# Allegro board pc069b_toplevel_18bare.brd
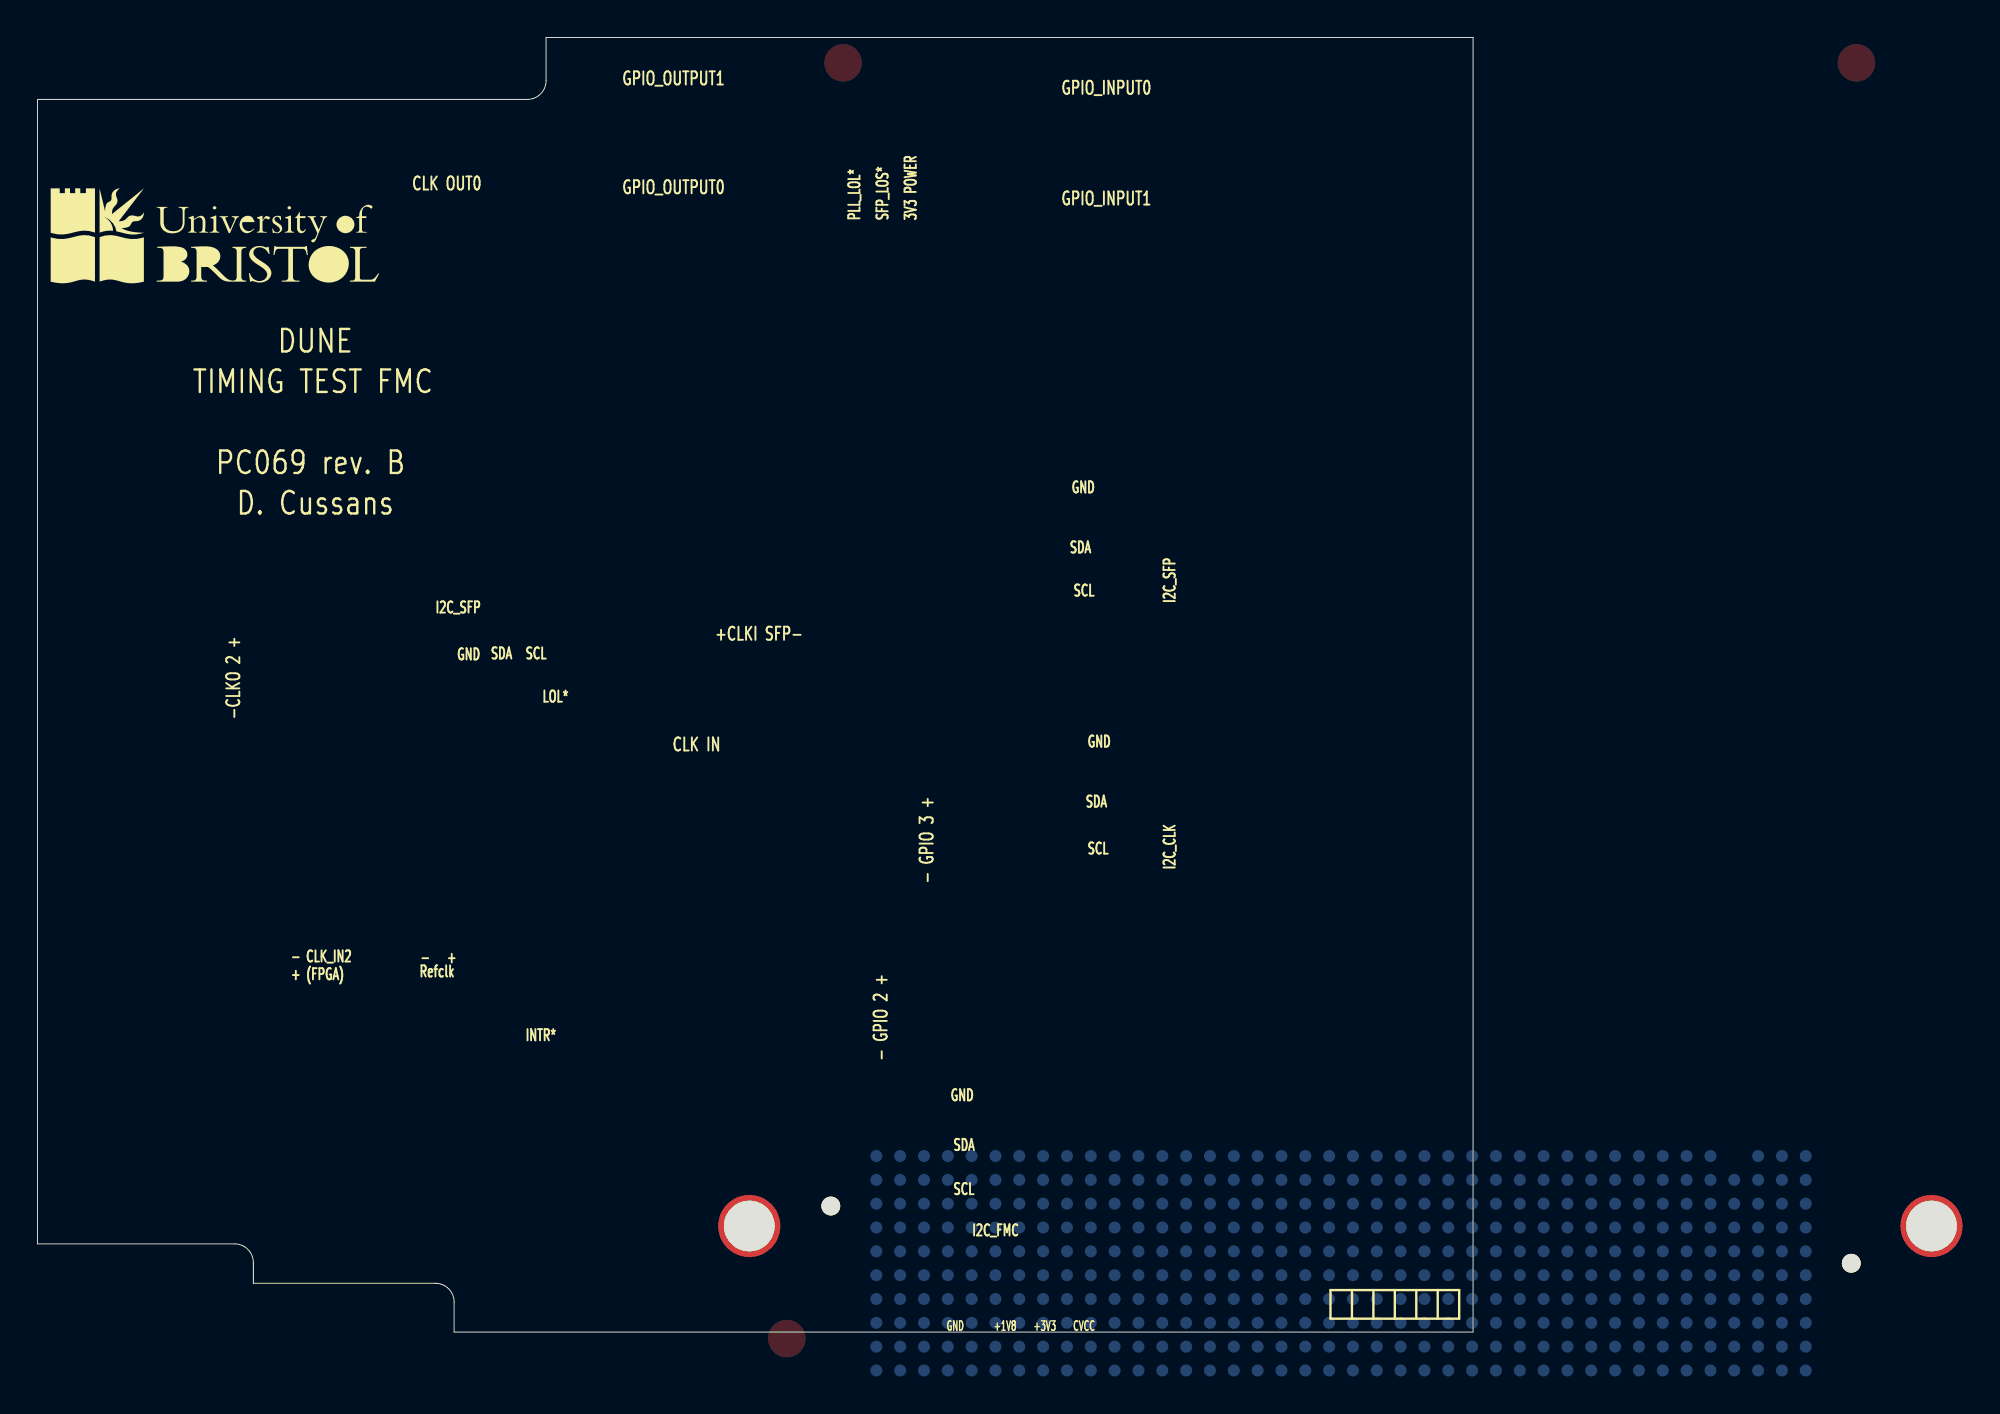
[diagram p0: board, top side]
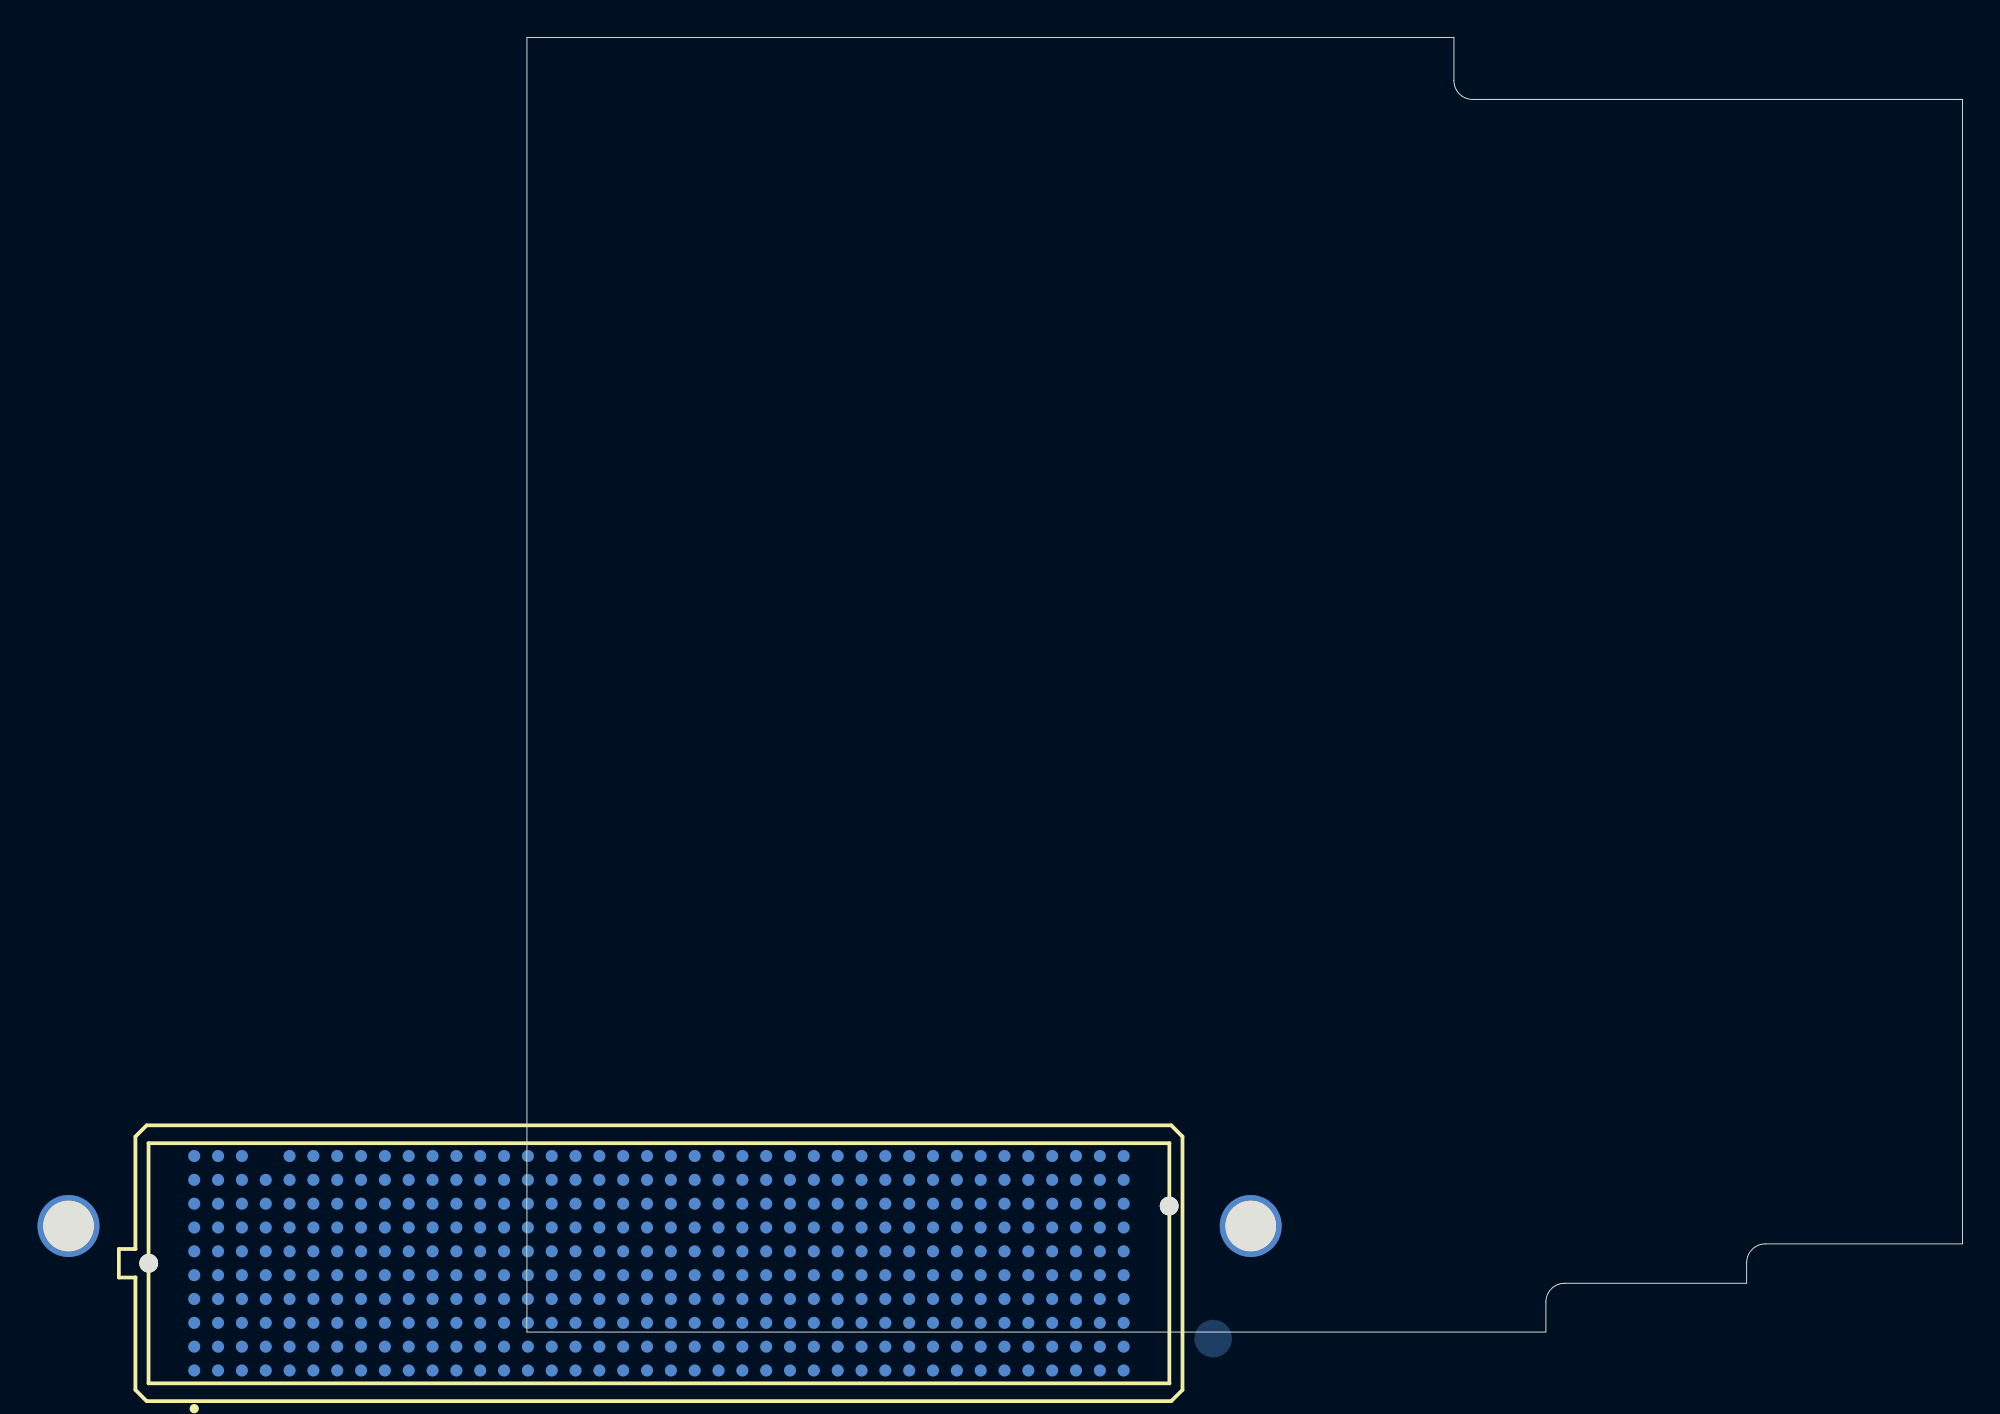
[diagram p1: board, bottom side, seen from below]

Outline 76.5 x 69 mm; copper layers: TOP, BOTTOM. Coordinates in mm from the lower left corner of the outline.
Outline path: 0,65.7 0,4.7 10.5,4.7 arc(11.21,4.41) 11.5,3.7 11.5,2.6 21.2,2.6 arc(21.91,2.31) 22.2,1.6 22.2,0 76.5,0 76.5,69 27.1,69 27.1,66.7 arc(26.81,65.99) 26.1,65.7 0,65.7

## Design rules (mm)
constraint set DEFAULT: min track width 0.127, pair gap 0.152
net group CLK0_M2C: nets CLK0_M2C_N CLK0_M2C_P
net group CLK_IN0: nets CLK_IN0_N CLK_IN0_P
net group CLK_IN1: nets CLK_IN1_N CLK_IN1_P
net group CLK_IN2: nets CLK_IN2_N CLK_IN2_P
net group DP_OSC: nets UNNAMED_4_CAPCERSMDCL2_I119_A UNNAMED_4_CAPCERSMDCL2_I120_A
net group F_FMC_CLK: nets CLK0_C2M_N CLK0_C2M_P
net group F_GPIO_OUT0: nets F_GPIO_OUT0_N F_GPIO_OUT0_P
net group F_GPIO_OUT1: nets F_GPIO_OUT1_N F_GPIO_OUT1_P
net group FFD_CLK: nets T_FFD_CLK_N T_FFD_CLK_P
net group FFD_DI: nets C2M_SFP_DATA_N C2M_SFP_DATA_P
net group FMC_REC_CLK: nets CLK1_M2C_N CLK1_M2C_P
net group GPIO_IN0: nets GPIO_IN0_N GPIO_IN0_P
net group GPIO_IN1: nets GPIO_IN1_N GPIO_IN1_P
net group GPIO_IO3: nets GPIO_IO3_N GPIO_IO3_P
net group OSC_CLK: nets OSC_CLK_N OSC_CLK_P
net group PAR_CLKO: nets T_DIFF_UFL_CLK_N T_DIFF_UFL_CLK_P
net group PAR_DI: nets GPIO_IO2_N GPIO_IO2_P
net group PLL_ZDM_CLK: nets PLL_ZDM_CLK_N PLL_ZDM_CLK_P
net group SFP2PLL_DATA: nets SFP2PLL_DATA_N SFP2PLL_DATA_P
net group SFP_DI: nets F_SFP_N F_SFP_P
net group SFP_DO: nets T_SFP_N T_SFP_P
net group T_FMC: nets M2C_SFP_DATA_N M2C_SFP_DATA_P
nets with their own width: min track width 0.254; nets CVCC GND
nets with their own width: min track width 0.3; nets CTRLVCC P1V8 P3V3 P12V

## Placement (name value [footprint] x y rotation side)
NOREF  -  []  76.5 0 90 top
NOREF#2  -  []  -17.4 170.4 0 top
NOREF#3  -  []  133.3 -3.6 0 top
NOREF#4  -  []  -14.4 165.4 0 top
NOREF#5  -  []  26.9 66.1 0 top
NOREF#6  -  []  36.8 -3.6 0 top
NOREF#7  -  []  0 4.7 90 top
NOREF#8  -  []  0.7 55.9 0 top
NOREF#9  -  []  0 -16 0 top
NOREF#10  -  []  193.22 -17.27 0 top
NOREF#11  -  []  76 135.5 0 top
NOREF#12  -  []  65.6 3 0 top
NOREF#13  -  []  -17.4 -17.4 0 top
NOREF#14  -  []  14.55 96.4 0 top
NOREF#15  -  []  22.2 -3 0 top
NOREF#16  -  []  76.5 -16 0 top
NOREF#17  -  []  96.5 -16 0 top
NOREF#18  -  []  79.4 51.5 0 top
NOREF#19  -  []  11.5 2.6 90 top
NOREF#20  -  []  0 65.7 0 top
NOREF#21  -  []  -14.4 -12.4 0 top
NOREF#22  -  []  11.5 2.6 0 top
NOREF#23  -  []  -19.38 84 0 top
NOREF#24  -  []  76 219.5 0 top
NOREF#25  -  []  -17.4 -17.4 0 top
NOREF#26  -  [unnamed#2]  100.93 5.65 270 top
NOREF#27  -  []  11 63.45 90 top
NOREF#28  -  []  76 185.5 0 top
NOREF#29  -  [unnamed#2]  37.93 5.65 270 top
NOREF#30  -  []  173 -16 0 top
NOREF#31  -  []  15.2 23.1 0 top
NOREF#32  -  []  -94 -116.7 0 top
NOREF#33  -  []  0 4.65 0 top
NOREF#34  -  []  2.6 -16.15 0 top
NOREF#35  -  []  -18.77 254.4 0 top
NOREF#36  -  []  79.5 0 90 top
NOREF#37  -  []  -17.4 -17.4 0 top
NOREF#38  -  []  11.21 4.4 0 top
NOREF#39  -  []  0 -3 0 top
NOREF#40  -  []  0 64.3 0 top
NOREF#41  -  []  76 101.5 0 top
NOREF#42  -  []  -7.4 -16.15 0 top
NOREF#43  -  []  -14.3 0 0 top
NOREF#44  -  []  11.5 -2.5 0 top
NOREF#45  -  []  180.4 -21.05 0 top
NOREF#46  -  []  -19.38 153 0 top
NOREF#47  -  []  109.15 64.3 0 top
NOREF#48  -  []  -14.3 69 0 top
NOREF#49  -  []  266.9 -16.15 0 top
NOREF#50  -  []  -14.3 237 0 top
NOREF#51  -  []  22 2.2 0 top
NOREF#52  -  []  0 65.7 0 top
NOREF#53  -  []  -18.77 249.4 0 top
NOREF#54  -  []  -14.3 168 0 top
NOREF#55  -  []  12.65 64.3 0 top
NOREF#56  -  []  27.1 69 0 top
NOREF#57  -  []  22.2 0 90 top
NOREF#58  -  []  76 17.5 0 top
P1  -  [SAMTEC_SEAM-40-035-S-10-2-A]  69.46 3.67 0 bottom

## Library data of the parts
P1 = CON400P_40ABCDEFGHJK: part number: CON400P_40ABCDEFGHJK-SEAM-40-03.5-S-10-2-A-K-TR

## Footprints (pads in the part's own frame, mm; a bottom-side part is the same pattern mirrored in y, then rotated)
SAMTEC_SEAM-40-035-S-10-2-A
  round 1 hole 1.3 unplated: (-27.19,-3.05) (27.19,0)
  round 0.64 smd: A1(24.765,5.715) A2(23.495,5.715) A3(22.225,5.715) A4(20.955,5.715) A5(19.685,5.715) A6(18.415,5.715) A7(17.145,5.715) A8(15.875,5.715) A9(14.605,5.715) A10(13.335,5.715) A11(12.065,5.715) A12(10.795,5.715) A13(9.525,5.715) A14(8.255,5.715) A15(6.985,5.715) A16(5.715,5.715) A17(4.445,5.715) A18(3.175,5.715) A19(1.905,5.715) A20(0.635,5.715) A21(-0.635,5.715) A22(-1.905,5.715) A23(-3.175,5.715) A24(-4.445,5.715) A25(-5.715,5.715) A26(-6.985,5.715) A27(-8.255,5.715) A28(-9.525,5.715) A29(-10.795,5.715) A30(-12.065,5.715) A31(-13.335,5.715) A32(-14.605,5.715) A33(-15.875,5.715) A34(-17.145,5.715) A35(-18.415,5.715) A36(-19.685,5.715) A37(-20.955,5.715) A38(-22.225,5.715) A39(-23.495,5.715) A40(-24.765,5.715) B1(24.765,4.445) B2(23.495,4.445) B3(22.225,4.445) B4(20.955,4.445) B5(19.685,4.445) B6(18.415,4.445) B7(17.145,4.445) B8(15.875,4.445) B9(14.605,4.445) B10(13.335,4.445) B11(12.065,4.445) B12(10.795,4.445) B13(9.525,4.445) B14(8.255,4.445) B15(6.985,4.445) B16(5.715,4.445) B17(4.445,4.445) B18(3.175,4.445) B19(1.905,4.445) B20(0.635,4.445) B21(-0.635,4.445) B22(-1.905,4.445) B23(-3.175,4.445) B24(-4.445,4.445) B25(-5.715,4.445) B26(-6.985,4.445) B27(-8.255,4.445) B28(-9.525,4.445) B29(-10.795,4.445) B30(-12.065,4.445) B31(-13.335,4.445) B32(-14.605,4.445) B33(-15.875,4.445) B34(-17.145,4.445) B35(-18.415,4.445) B36(-19.685,4.445) B37(-20.955,4.445) B38(-22.225,4.445) B39(-23.495,4.445) B40(-24.765,4.445) C1(24.765,3.175) C2(23.495,3.175) C3(22.225,3.175) C4(20.955,3.175) C5(19.685,3.175) C6(18.415,3.175) C7(17.145,3.175) C8(15.875,3.175) C9(14.605,3.175) C10(13.335,3.175) C11(12.065,3.175) C12(10.795,3.175) C13(9.525,3.175) C14(8.255,3.175) C15(6.985,3.175) C16(5.715,3.175) C17(4.445,3.175) C18(3.175,3.175) C19(1.905,3.175) C20(0.635,3.175) C21(-0.635,3.175) C22(-1.905,3.175) C23(-3.175,3.175) C24(-4.445,3.175) C25(-5.715,3.175) C26(-6.985,3.175) C27(-8.255,3.175) C28(-9.525,3.175) C29(-10.795,3.175) C30(-12.065,3.175) C31(-13.335,3.175) C32(-14.605,3.175) C33(-15.875,3.175) C34(-17.145,3.175) C35(-18.415,3.175) C36(-19.685,3.175) C37(-20.955,3.175) C38(-22.225,3.175) C39(-23.495,3.175) C40(-24.765,3.175) D1(24.765,1.905) D2(23.495,1.905) D3(22.225,1.905) D4(20.955,1.905) D5(19.685,1.905) D6(18.415,1.905) D7(17.145,1.905) D8(15.875,1.905) D9(14.605,1.905) D10(13.335,1.905) D11(12.065,1.905) D12(10.795,1.905) D13(9.525,1.905) D14(8.255,1.905) D15(6.985,1.905) D16(5.715,1.905) D17(4.445,1.905) D18(3.175,1.905) D19(1.905,1.905) D20(0.635,1.905) D21(-0.635,1.905) D22(-1.905,1.905) D23(-3.175,1.905) D24(-4.445,1.905) D25(-5.715,1.905) D26(-6.985,1.905) D27(-8.255,1.905) D28(-9.525,1.905) D29(-10.795,1.905) D30(-12.065,1.905) D31(-13.335,1.905) D32(-14.605,1.905) D33(-15.875,1.905) D34(-17.145,1.905) D35(-18.415,1.905) D36(-19.685,1.905) D37(-20.955,1.905) D38(-22.225,1.905) D39(-23.495,1.905) D40(-24.765,1.905) E1(24.765,0.635) E2(23.495,0.635) E3(22.225,0.635) E4(20.955,0.635) E5(19.685,0.635) E6(18.415,0.635) E7(17.145,0.635) E8(15.875,0.635) E9(14.605,0.635) E10(13.335,0.635) E11(12.065,0.635) E12(10.795,0.635) E13(9.525,0.635) E14(8.255,0.635) E15(6.985,0.635) E16(5.715,0.635) E17(4.445,0.635) E18(3.175,0.635) E19(1.905,0.635) E20(0.635,0.635) E21(-0.635,0.635) E22(-1.905,0.635) E23(-3.175,0.635) E24(-4.445,0.635) E25(-5.715,0.635) E26(-6.985,0.635) E27(-8.255,0.635) E28(-9.525,0.635) E29(-10.795,0.635) E30(-12.065,0.635) E31(-13.335,0.635) E32(-14.605,0.635) E33(-15.875,0.635) E34(-17.145,0.635) E35(-18.415,0.635) E36(-19.685,0.635) E37(-20.955,0.635) E38(-22.225,0.635) E39(-23.495,0.635) E40(-24.765,0.635) F1(24.765,-0.635) F2(23.495,-0.635) F3(22.225,-0.635) F4(20.955,-0.635) F5(19.685,-0.635) F6(18.415,-0.635) F7(17.145,-0.635) F8(15.875,-0.635) F9(14.605,-0.635) F10(13.335,-0.635) F11(12.065,-0.635) F12(10.795,-0.635) F13(9.525,-0.635) F14(8.255,-0.635) F15(6.985,-0.635) F16(5.715,-0.635) F17(4.445,-0.635) F18(3.175,-0.635) F19(1.905,-0.635) F20(0.635,-0.635) F21(-0.635,-0.635) F22(-1.905,-0.635) F23(-3.175,-0.635) F24(-4.445,-0.635) F25(-5.715,-0.635) F26(-6.985,-0.635) F27(-8.255,-0.635) F28(-9.525,-0.635) F29(-10.795,-0.635) F30(-12.065,-0.635) F31(-13.335,-0.635) F32(-14.605,-0.635) F33(-15.875,-0.635) F34(-17.145,-0.635) F35(-18.415,-0.635) F36(-19.685,-0.635) F37(-20.955,-0.635) F38(-22.225,-0.635) F39(-23.495,-0.635) F40(-24.765,-0.635) G1(24.765,-1.905) G2(23.495,-1.905) G3(22.225,-1.905) G4(20.955,-1.905) G5(19.685,-1.905) G6(18.415,-1.905) G7(17.145,-1.905) G8(15.875,-1.905) G9(14.605,-1.905) G10(13.335,-1.905) G11(12.065,-1.905) G12(10.795,-1.905) G13(9.525,-1.905) G14(8.255,-1.905) G15(6.985,-1.905) G16(5.715,-1.905) G17(4.445,-1.905) G18(3.175,-1.905) G19(1.905,-1.905) G20(0.635,-1.905) G21(-0.635,-1.905) G22(-1.905,-1.905) G23(-3.175,-1.905) G24(-4.445,-1.905) G25(-5.715,-1.905) G26(-6.985,-1.905) G27(-8.255,-1.905) G28(-9.525,-1.905) G29(-10.795,-1.905) G30(-12.065,-1.905) G31(-13.335,-1.905) G32(-14.605,-1.905) G33(-15.875,-1.905) G34(-17.145,-1.905) G35(-18.415,-1.905) G36(-19.685,-1.905) G37(-20.955,-1.905) G38(-22.225,-1.905) G39(-23.495,-1.905) G40(-24.765,-1.905) H1(24.765,-3.175) H2(23.495,-3.175) H3(22.225,-3.175) H4(20.955,-3.175) H5(19.685,-3.175) H6(18.415,-3.175) H7(17.145,-3.175) H8(15.875,-3.175) H9(14.605,-3.175) H10(13.335,-3.175) H11(12.065,-3.175) H12(10.795,-3.175) H13(9.525,-3.175) H14(8.255,-3.175) H15(6.985,-3.175) H16(5.715,-3.175) H17(4.445,-3.175) H18(3.175,-3.175) H19(1.905,-3.175) H20(0.635,-3.175) H21(-0.635,-3.175) H22(-1.905,-3.175) H23(-3.175,-3.175) H24(-4.445,-3.175) H25(-5.715,-3.175) H26(-6.985,-3.175) H27(-8.255,-3.175) H28(-9.525,-3.175) H29(-10.795,-3.175) H30(-12.065,-3.175) H31(-13.335,-3.175) H32(-14.605,-3.175) H33(-15.875,-3.175) H34(-17.145,-3.175) H35(-18.415,-3.175) H36(-19.685,-3.175) H37(-20.955,-3.175) H38(-22.225,-3.175) H39(-23.495,-3.175) H40(-24.765,-3.175) J1(24.765,-4.445) J2(23.495,-4.445) J3(22.225,-4.445) J4(20.955,-4.445) J5(19.685,-4.445) J6(18.415,-4.445) J7(17.145,-4.445) J8(15.875,-4.445) J9(14.605,-4.445) J10(13.335,-4.445) J11(12.065,-4.445) J12(10.795,-4.445) J13(9.525,-4.445) J14(8.255,-4.445) J15(6.985,-4.445) J16(5.715,-4.445) J17(4.445,-4.445) J18(3.175,-4.445) J19(1.905,-4.445) J20(0.635,-4.445) J21(-0.635,-4.445) J22(-1.905,-4.445) J23(-3.175,-4.445) J24(-4.445,-4.445) J25(-5.715,-4.445) J26(-6.985,-4.445) J27(-8.255,-4.445) J28(-9.525,-4.445) J29(-10.795,-4.445) J30(-12.065,-4.445) J31(-13.335,-4.445) J32(-14.605,-4.445) J33(-15.875,-4.445) J34(-17.145,-4.445) J35(-18.415,-4.445) J36(-19.685,-4.445) J37(-20.955,-4.445) J38(-22.225,-4.445) J39(-23.495,-4.445) J40(-24.765,-4.445) K1(24.765,-5.715) K2(23.495,-5.715) K3(22.225,-5.715) K5(19.685,-5.715) K6(18.415,-5.715) K7(17.145,-5.715) K8(15.875,-5.715) K9(14.605,-5.715) K10(13.335,-5.715) K11(12.065,-5.715) K12(10.795,-5.715) K13(9.525,-5.715) K14(8.255,-5.715) K15(6.985,-5.715) K16(5.715,-5.715) K17(4.445,-5.715) K18(3.175,-5.715) K19(1.905,-5.715) K20(0.635,-5.715) K21(-0.635,-5.715) K22(-1.905,-5.715) K23(-3.175,-5.715) K24(-4.445,-5.715) K25(-5.715,-5.715) K26(-6.985,-5.715) K27(-8.255,-5.715) K28(-9.525,-5.715) K29(-10.795,-5.715) K30(-12.065,-5.715) K31(-13.335,-5.715) K32(-14.605,-5.715) K33(-15.875,-5.715) K34(-17.145,-5.715) K35(-18.415,-5.715) K36(-19.685,-5.715) K37(-20.955,-5.715) K38(-22.225,-5.715) K39(-23.495,-5.715) K40(-24.765,-5.715)
  round 0 smd: K4(20.955,-5.715)
unnamed#2
  round 3.302 hole 2.7: (0,0)

## Nets
GND: P1.A1 P1.A4 P1.A5 P1.A8 P1.A9 P1.A12 P1.A13 P1.A16 P1.A17 P1.A20 P1.A21 P1.A24 P1.A25 P1.A28 P1.A29 P1.A32 P1.A33 P1.A36 P1.A37 P1.A40 P1.B2 P1.B3 P1.B6 P1.B7 P1.B10 P1.B11 P1.B14 P1.B15 P1.B18 P1.B19 P1.B22 P1.B23 P1.B26 P1.B27 P1.B30 P1.B31 P1.B34 P1.B35 P1.B38 P1.B39 P1.C1 P1.C4 P1.C5 P1.C8 P1.C9 P1.C12 P1.C13 P1.C16 P1.C17 P1.C20 P1.C21 P1.C24 P1.C25 P1.C28 P1.C29 P1.C32 P1.C33 P1.C36 P1.C38 P1.C40 P1.D2 P1.D3 P1.D6 P1.D7 P1.D10 P1.D13 P1.D16 P1.D19 P1.D22 P1.D25 P1.D28 P1.D37 P1.D39 P1.E1 P1.E4 P1.E5 P1.E8 P1.E11 P1.E14 P1.E17 P1.E20 P1.E23 P1.E26 P1.E29 P1.E32 P1.E35 P1.E38 P1.E40 P1.F2 P1.F3 P1.F6 P1.F9 P1.F12 P1.F15 P1.F18 P1.F21 P1.F24 P1.F27 P1.F30 P1.F33 P1.F36 P1.F39 P1.G1 P1.G4 P1.G5 P1.G8 P1.G11 P1.G14 P1.G17 P1.G20 P1.G23 P1.G26 P1.G29 P1.G32 P1.G35 P1.G38 P1.G40 P1.H2 P1.H3 P1.H6 P1.H9 P1.H12 P1.H15 P1.H18 P1.H21 P1.H24 P1.H27 P1.H30 P1.H33 P1.H36 P1.H39 P1.J1 P1.J4 P1.J5 P1.J8 P1.J11 P1.J14 P1.J17 P1.J20 P1.J23 P1.J26 P1.J29 P1.J32 P1.J35 P1.J38 P1.J40 P1.K2 P1.K3 P1.K6 P1.K9(K<9>) P1.K12 P1.K15 P1.K18 P1.K21 P1.K24 P1.K27 P1.K30 P1.K33 P1.K36 P1.K39
P3V3: P1.C39 P1.D36 P1.D38 P1.D40
P12V: P1.C35 P1.C37
C2M_SFP_DATA_N: P1.G22
C2M_SFP_DATA_P: P1.G21
CLK0_C2M_N: P1.G7
CLK0_C2M_P: P1.G6
CLK0_M2C_N: P1.H5
CLK0_M2C_P: P1.H4
CLK1_M2C_N: P1.G3
CLK1_M2C_P: P1.G2
CTRLVCC: P1.D32
CVCC: P1.G39 P1.H40
F_GPIO_OUT0_N: P1.G10
F_GPIO_OUT0_P: P1.G9
F_GPIO_OUT1_N: P1.H23
F_GPIO_OUT1_P: P1.H22
FMC_GA0: P1.C34
FMC_GA1: P1.D35
FMC_SCL: P1.C30
FMC_SDA: P1.C31
FPGA_CLK_RST: P1.G30
FPGA_CLK_SCL: P1.H16
FPGA_CLK_SDA: P1.H17
FPGA_SFP_LOS: P1.D14
FPGA_SFP_SCL: P1.H13
FPGA_SFP_SDA: P1.H14
FPGA_SFP_TX_DIS: P1.D17
FPGA_SFP_TX_FLT: P1.D18
GPIO_IN0_N: P1.C11
GPIO_IN0_P: P1.C10
GPIO_IN1_N: P1.D12
GPIO_IN1_P: P1.D11
GPIO_IO2_N: P1.H29
GPIO_IO2_P: P1.H28
GPIO_IO3_N: P1.G19
GPIO_IO3_P: P1.G18
M2C_SFP_DATA_N: P1.H26
M2C_SFP_DATA_P: P1.H25
UNNAMED_2_CON400P40ABCDEFGHJK_I: P1.D30 P1.D31

Pads without a net: P1 A2 A3 A6 A7 A10 A11 A14 A15 A18 A19 A22 A23 A26 A27 A30 A31 A34 A35 A38 A39 B1 B4 B5 B8 B9 B12 B13 B16 B17 B20 B21 B24 B25 B28 B29 B32 B33 B36 B37 B40 C2 C3 C6 C7 C14 C15 C18 C19 C22 C23 C26 C27 D1 D4 D5 D8 D9 D15 D20 D21 D23 D24 D26 D27 D29 D33 D34 E2 E3 E6 E7 E9 E10 E12 E13 E15 E16 E18 E19 E21 E22 E24 E25 E27 E28 E30 E31 E33 E34 E36 E37 E39 F1 F4 F5 F7 F8 F10 F11 F13 F14 F16 F17 F19 F20 F22 F23 F25 F26 F28 F29 F31 F32 F34 F35 F37 F38 F40 G12 G13 G15 G16 G24 G25 G27 G28 G31 G33 G34 G36 G37 H1 H7 H8 H10 H11 H19 H20 H31 H32 H34 H35 H37 H38 J2 J3 J6 J7 J9 J10 J12 J13 J15 J16 J18 J19 J21 J22 J24 J25 J27 J28 J30 J31 J33 J34 J36 J37 J39 K1 K4 K5 K7 K8 K10 K11 K13 K14 K16 K17 K19 K20 K22 K23 K25 K26 K28 K29 K31 K32 K34 K35 K37 K38 K40

## Copper pours and planes (outline as drawn; the poured copper is in the pictures)
GND on TOP: 41.93,67.65 43.93,67.65
GND on TOP: 95.93,67.65 97.93,67.65
GND on TOP, BOTTOM: 38.93,-0.35 40.93,-0.35

## Text on the board
User.Comments: DUNE Timing System "Reference Hardware" FMC , pc069 | 22/Aug/23 | B | DGC
Ref Des/Silkscreen Top: GND       +1V8    +3V3    CVCC | - CLK_IN2 | + (FPGA) | Refclk | -   + | I2C_SFP | GND | SDA | SCL | INTR* | LOL* | I2C_FMC | PLL_LOL* | SFP_LOS* | 3V3 POWER | I2C_CLK | CLK OUT0 | GPIO_OUTPUT1 | GPIO_OUTPUT0 | CLK IN | +CLKI SFP- | GPIO_INPUT0 | GPIO_INPUT1 | -CLKO 2 + | - GPIO 2 + | - GPIO 3 + | DUNE | D. Cussans
User.45: FIGURE | FINISHED_SIZE | 0.3 | 0.5 | 0.8128 | 0.8499 | 0.95 | 1.0 | 1.05 | 2.7 | 1.3 | 1.4 | DRILL CHART: TOP to BOTTOM | ALL UNITS ARE IN MILLIMETERS | PLATED | NON-PLATED | QTY | 535 | 6 | 2 | 1 | 9 | 19 | 10 | 4
